# EAGLE board spacer_f1 (EAGLE 8.7.1)

Size 100 x 100 mm. Coordinates in mm from the lower left corner, seen from the top.
Outline: 8,100 42,100 42,86 57,86 57,100 92,100 92,79 100,79 100,9.5 99,9.5 99,1 90.5,1 90.5,0 9.5,0 9.5,1 1,1 1,9.5 0,9.5 0,79 8,79 8,100
Outline: 12,70 20,78 82,78 94,66 94,34 72,12 34,12 12,34 12,70
Outline: 41.5,5.04 41.5,9.04 51.5,9.04 51.5,5.04 41.5,5.04
Copper layers (1*16): Top 0.035mm / dielectric 1.5mm / Bottom 0.035mm
Design rules "default": minimum track width 6mil, minimum drill 0.35mm, track to track 6mil, track to pad 6mil, pad to pad 6mil, via to via 6mil, smd to smd 6mil, copper to edge 40mil, drill to drill 6mil, minimum pad ring 10mil, minimum via ring 8mil, stop-mask expansion 4mil, vias tented up to drill 0mil, thermal gap 10mil
Holes 4 mm at 2.5,33.04 2.5,67.04 97.5,67.04 97.5,33.04
Holes 9 mm at 65.49,85.16 71.49,87.6 28.53,21.35 28.27,87.48

## Footprints (pad centres in the part's own frame; a part is rotated, then mirrored left to right if it is on the bottom)
#4-40_BOLT_HOLE = hole 2.9: 0,0
SDR_B200MINI = hole 3.18: -33,21.6; -33,-21.6; 33,21.6; 33,-21.6

## Placement (x,y rotation side)
U$1  [#4-40_BOLT_HOLE]  4.2,74.7 0 top
U$2  [#4-40_BOLT_HOLE]  25.3,95.8 0 top
U$3  [#4-40_BOLT_HOLE]  74.7,95.8 0 top
U$4  [#4-40_BOLT_HOLE]  95.8,74.7 0 top
U$7  [#4-40_BOLT_HOLE]  95.8,25.3 180 top
U$8  [#4-40_BOLT_HOLE]  74.7,4.2 180 top
U$9  [#4-40_BOLT_HOLE]  25.3,4.2 180 top
U$10  [#4-40_BOLT_HOLE]  4.2,25.3 180 top
U$23  [SDR_B200MINI]  50,54.5 270 top

## Library data of the parts
U$1-U$4 U$7-U$10 = Hinges
U$23 = I_O_connectors